# Altium PCB flap.PcbDoc
Units mm, origin at the board's own origin, x right, y up, seen from the top; angles counter-clockwise.
Board outline 90 x 59 mm, 2 copper layers (Top Layer, Bottom Layer); 79 components, 56 nets, 277 pads, 201 vias.
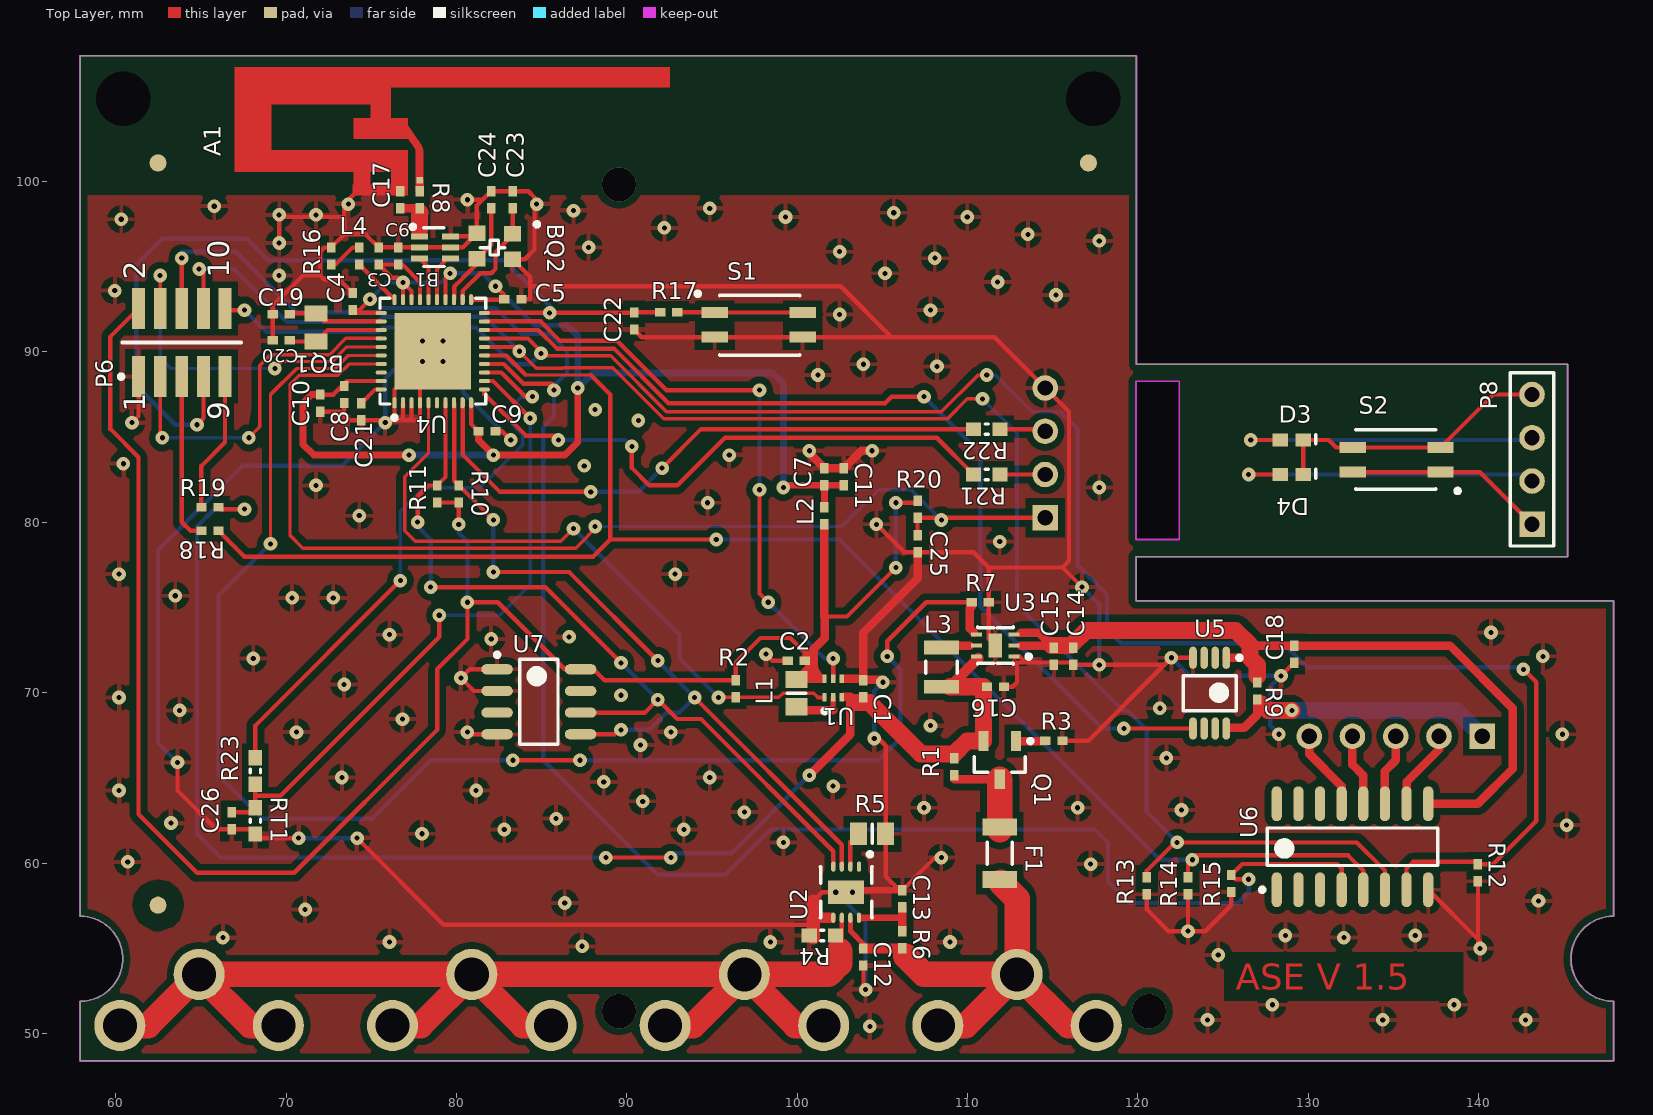
[diagram p0: Top Layer view]
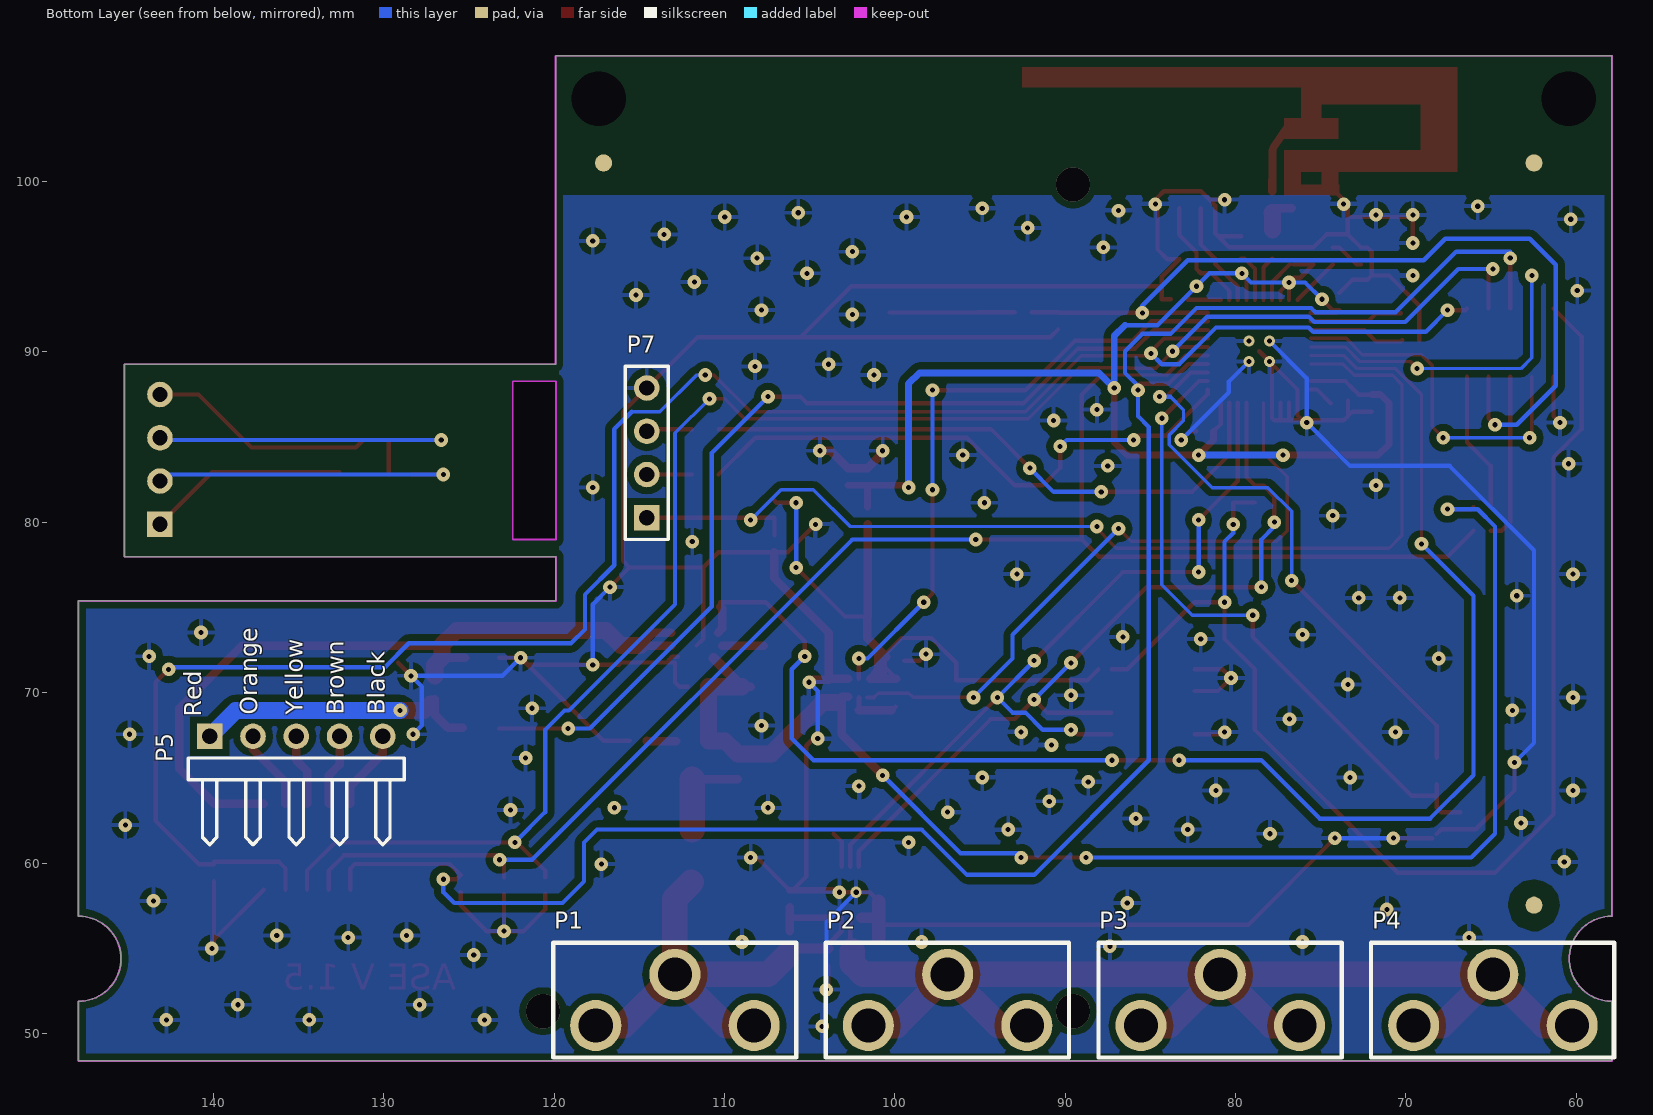
[diagram p1: Bottom Layer view, seen from below]

## Layer stack, top to bottom
Top Layer: signal copper 0.0356
Dielectric: dielectric 0.32, FR-4, Dk 4.8
Bottom Layer: signal copper 0.0356

## Board outline
57.912,48.387 57.912,51.887 ccw(c57.912,54.387) 57.912,56.887 57.912,107.387 119.912,107.387 119.912,89.287 145.212,89.287 145.212,77.978 119.888,77.978 119.888,75.387 147.912,75.387 147.912,56.887 ccw(c147.912,54.387) 147.912,51.887 147.912,48.387
cut-out: 122.428,88.289 119.912,88.289 119.888,88.265 119.888,78.994 122.428,78.994

## Design rules (kind name [scope] priority, off if disabled: settings)
Clearance Clearance_2 [InNet('NetB1_1')] p1: gap=0.16
Clearance Clearance_1 [InPolygon] p2: gap=0.4
Clearance [All] p3: gap=0.2
PolygonConnect [All] p1: connectstyle=Relief reliefconductorwidth=0.254 reliefentries=4 polygonreliefangle="90 Angle"
RoutingVias [All] p1: holewidth=0.711 width=1.27 viastyle="Through Hole" minholewidth=0.711 minwidth=1.27 maxholewidth=0.711 maxwidth=1.27
SilkscreenOverComponentPads [All] p1: minsilkscreentomaskgap=0.254
SolderMaskExpansion [All] p1: expansion=0
Width [All] p1: maxlimit=3 minlimit=0.2 preferedwidth=0.254
27 further rules are at their usual default settings.

## Components (designator, comment, footprint, x,y, rotation, side; value= is the part's Value field where it differs from the comment)
A1 "ANT" "F ant" 77.597,99.822 r0 top
B1 "BALUN" 2450BM15A0002 78.74,96.139 r0 top
BQ1 "Crystal" FC-12M 71.755,91.44 r270 top
BQ2 "Crystal" 403C11A32M00000 82.169,96.139 r180 top
C1 "Capacitor" 0402 103.886,70.231 r90 top
C2 "Capacitor" 0402 99.949,71.882 r180 top
C3 "Capacitor" 0402 75.438,95.631 r90 top
C4 "Capacitor" 0402 73.914,92.964 r90 top
C5 "Capacitor" 0402 83.312,93.091 r0 top
C6 "Capacitor" 0402 76.581,95.631 r90 top
C7 "Capacitor" 0402 101.6,82.677 r90 top
C8 "Capacitor" 0402 73.406,87.503 r270 top
C9 "Capacitor" 0402 81.788,85.344 r0 top
C10 "Capacitor" 0402 72.009,86.995 r270 top
C11 "Capacitor" 0402 102.743,82.677 r90 top
C12 "Capacitor" 0402 103.886,54.483 r270 top
C13 "Capacitor" 0402 106.172,57.912 r90 top
C14 "Capacitor" 0402 116.205,72.136 r270 top
C15 "Capacitor" 0402 115.062,72.136 r270 top
C16 "Capacitor" 0402 111.633,70.358 r0 top
C17 "Capacitor" 0402 76.708,98.933 r90 top
C18 "Capacitor" 0402 129.159,72.263 r270 top
C19 "Capacitor" 0402 69.723,92.202 r0 top
C20 "Capacitor" 0402 69.723,90.678 r0 top
C21 "Capacitor" 0402 74.422,86.487 r270 top
C22 "Capacitor" 0402 90.424,91.821 r270 top
C23 "Capacitor" 0402 83.312,98.933 r270 top
C24 "Capacitor" 0402 82.042,98.933 r270 top
C25 "Capacitor" 0402 107.061,78.74 r270 top
C26 "Capacitor" 0402 66.802,62.484 r270 top
D3 "Led" LED0603 129.032,84.836 r0 top
D4 "Led" LED0603 129.032,82.804 r0 top
F1 "Fuse, slow 0,5A" SF1206S0502 111.887,60.579 r90 top
L1 "Inductor" 6-0805_L 99.949,69.977 r90 top
L2 "Inductor" 0402 101.6,80.391 r90 top
L3 "Inductor" 1008 108.458,71.501 r90 top
L4 "Inductor" 0402 74.295,95.631 r270 top
P1 "Connector" BAT_CLIP1 112.903,53.467 r180 bottom
P2 "Connector" BAT_CLIP1 96.901,53.467 r180 bottom
P3 "Connector" BAT_CLIP1 80.899,53.467 r180 bottom
P4 "Connector" BAT_CLIP1 64.897,53.467 r180 bottom
P5 "24BYJ48" HDR1X5H 140.208,67.437 r180 bottom
P6 "*" 20021121-00010C4LF 63.881,90.551 r90 top
P7 "Header 4" HDR1X4 114.554,80.264 r90 bottom
P8 "Header 4" HDR1X4 143.129,79.883 r90 top
Q1 "IRLML6302GTRPBF" SOT-23_N 111.887,66.04 r270 top
R1 "Blob" 0402 109.22,65.659 r270 top
R2 "Resistor" 0402 96.393,70.231 r270 top
R3 "Resistor" 0402 115.062,67.183 r0 top
R4 "Resistor" 0603 101.473,55.753 r180 top
R5 "Resistor" 6-0805_L 104.394,61.722 r0 top
R6 "Resistor" 0402 106.172,55.499 r90 top
R7 "Resistor" 0402 110.744,75.311 r0 top
R8 "Blob" 0402 77.851,98.933 r90 top
R9 "Resistor" 0402 127,70.104 r90 top
R10 "Resistor" 0402 80.137,81.661 r270 top
R11 "Resistor" 0402 78.867,81.661 r270 top
R12 "Resistor" 0402 139.954,59.436 r270 top
R13 "Resistor" 0402 120.523,58.674 r270 top
R14 "Resistor" 0402 122.936,58.674 r270 top
R15 "Resistor" 0402 125.476,58.801 r270 top
R16 "Resistor" 0402 72.644,95.631 r90 top
R17 "Resistor" 0402 92.456,92.329 r180 top
R18 "Blob" 0402 65.532,79.502 r0 top
R19 "Blob" 0402 65.532,80.899 r0 top
R20 "Resistor" 0402 107.061,80.772 r270 top
R21 "Resister" 0603 111.125,82.804 r180 top
R22 "Resister" 0603 111.125,85.471 r180 top
R23 "Resistor" 0603 68.199,65.405 r90 top
RT1 "Thermistor" 0603 68.199,62.484 r270 top
S1 "Button" EVQP2402W 97.79,91.567 r0 top
S2 "Button" EVQP2402W 135.128,83.693 r180 top
U1 "TPS62730" 6SON 102.108,70.273 r90 top
U2 "STC3100" DFN8 102.87,58.293 r270 top
U3 "TPS61240DRVT" WSON6 111.633,72.771 r180 top
U4 "CC2530F256" QFN40 78.613,90.043 r90 top
U5 "AD8217BRMZ-R7" 8MSOP 124.206,69.977 r270 top
U6 "ULN2003ADR" 16SOIC 132.588,60.96 r90 top
U7 "M24M02" SO8 84.836,69.469 r0 top

## Footprints (in the part's own frame and the unit in brackets; to place one, negate y for a bottom-side part, rotate by r counter-clockwise, add the part's x,y. Pads: shape width x height; smd on the part's side, far side on the other; paste and mask are expansions set on the pad)
6-0805_L [mm] "Chip Resistor, Body 2.0x1.2mm, IPC High Density"
  rect 1x1.3 smd: 1(-0.8,0) 2(0.8,0)
  silkscreen extent 0,-0.55 0,0.55, body extent -1.07,-0.7 1.07,0.7, height 0.7
6SON [mm] "IC DCDC CONV STP-DN SYNC LP 6SON"
  rect 0.5x0.25 smd: 1(-0.55,0.5) 2(-0.55,0) 3(-0.55,-0.5) 4(0.55,-0.5) 5(0.55,0) 6(0.55,0.5)
  silkscreen extent -1.47,0.38 -1.23,0.62, body extent -0.52,-0.75 0.53,0.75, height 0.6
8MSOP [mm] "MSOP, 8-Leads, Body 3,1x3,1mm (max), Pitch 0,65mm, IPC High Density"
  oval 1.3x0.45 smd: 1(-2.075,0.975) 2(-2.075,0.325) 3(-2.075,-0.325) 4(-2.075,-0.975) 5(2.075,-0.975) 6(2.075,-0.325) 7(2.075,0.325) 8(2.075,0.975)
  silkscreen extent -2.2,-1.55 1.02,1.88, body extent -1.55,-1.55 1.55,1.55, height 1.1
16SOIC [mm] "TRANS 7 NPN DARL 50V 500MA 16SO"
  oval 2.05x0.6 smd: 1(-2.525,4.445) 2(-2.525,3.175) 3(-2.525,1.905) 4(-2.525,0.635) 5(-2.525,-0.635) 6(-2.525,-1.905) 7(-2.525,-3.175) 8(-2.525,-4.445) 9(2.525,-4.445) 10(2.525,-3.175) 11(2.525,-1.905) 12(2.525,-0.635) 13(2.525,0.635) 14(2.525,1.905) 15(2.525,3.175) 16(2.525,4.445)
  silkscreen extent -2.65,-5 1.1,5.42, body extent -2,-5 2,5, height 1.75
0402 [mm] "Chip Capacitor, Body 1.0x0.5mm, IPC High Density"
  rect 0.6x0.5 smd: 1(-0.5,0) 2(0.5,0)
  body extent -0.55,-0.3 0.55,0.3, height 1.3
403C11A32M00000 [mm] "CRYSTAL 32MHZ 10PF SMD"
  rect 1x0.9 smd: 1(-1.125,-0.8) 2(0.975,-0.825) 3(0.975,0.675) 4(-1.125,0.7)
  silkscreen extent -2.68,-1.47 0.77,0.45, body extent -1.7,-1.22 1.53,1.15, height 0.85
0603 [mm] "0603, 2-Leads, Body 1,6x0,8mm, IPC High Density"
  rect 0.9x0.8 smd: 1(-0.775,0) 2(0.775,0)
  silkscreen extent -0.1,-0.3 0.1,0.3, body extent -0.8,-0.4 0.8,0.4, height 0.5
1008 [mm]
  rect 0.8x2.05 smd: 1(-1.15,0) 2(1.15,0)
  silkscreen extent -0.35,-0.93 0.35,0.92, body extent -1.25,-1 1.25,1, height 0.6
2450BM15A0002 [mm]
  rect 1x0.35 smd: 1(-0.9,0.65) 2(-0.9,0) 3(-0.9,-0.65) 4(0.925,-0.65) 5(0.925,0) 6(0.925,0.65)
  silkscreen extent -1.42,-1.13 0.55,1.32, body extent -0.63,-1 0.63,1, height 0.7
20021121-00010C4LF [mm] "CONN HEADER 10POS DL UNSHRD SMD"
  rect 2.4x0.75 smd: 1(-2,2.54) 2(2,2.54) 3(-2,1.27) 4(2,1.27) 5(-2,0) 6(2,0) 7(-2,-1.27) 8(2,-1.27) 9(-2,-2.54) 10(2,-2.54)
  silkscreen extent -2.12,-3.5 0.02,3.69, body extent -0.75,-3.5 0.75,3.5, height 5
BAT_CLIP1 [mm] "CONTACT BATTERY AA NEGATIVE"
  round 3 hole 2: 1(-4.65,-3) 1(0,0) 1(4.65,-3)
  silkscreen extent -7.15,-4.87 7.12,1.85, body extent -6.48,-4.38 6.25,1.35, height 14
DFN8 [mm]
  oval 0.6x0.25 smd: 1(-1.5,0.75) 2(-1.5,0.25) 3(-1.5,-0.25) 4(-1.5,-0.75) 5(1.5,-0.75) 6(1.5,-0.25) 7(1.5,0.25) 8(1.5,0.75)
  rect 1.4x2.1 smd: 9(0,0)
  silkscreen extent -2.35,-1.53 1.5,1.53, body extent -1.5,-1.5 1.5,1.5, height 0.9
EVQP2402W [mm] "QFN, 4-Leads, Body 3,5x4,7mm (max), Pitch 1,70mm, IPC High Density"
  rect 1.55x0.65 smd: 1(-2.625,0.75) 2(-2.625,-0.7) 3(2.525,0.75) 4(2.525,-0.7)
  silkscreen extent -3.75,-1.75 2.35,1.97, body extent -2.35,-1.75 2.35,1.75, height 2.5
"F ant" [mm] "F antenna 2.4Ghz"
  rect 0.4x0.4 smd paste+0: 1(0.254,0.254)
  rect 3x0.01 smd: 2(-2.032,0)
  Top Layer region: -3.65,0 -2.65,0 -2.65,0.74 -3.65,0.74
  Top Layer region: -1.45,0 -0.45,0 -0.45,0.74 -1.45,0.74
  Top Layer region: -2.65,3.9 -1.45,3.9 -1.45,4.7 -2.65,4.7
  Top Layer region: -8.45,0.74 -3.575,0.74 -3.575,2.03 -8.45,2.03
  Top Layer region: -10.63,4.7 -1.45,4.7 -1.45,5.7 -10.63,5.7
  Top Layer region: -10.63,5.7 14.95,5.7 14.95,6.91 -10.63,6.91
  Top Layer region: -10.63,0.74 -8.45,0.74 -8.45,4.7 -10.63,4.7
  Top Layer region: -3.65,2.69 -0.45,2.69 -0.45,3.9 -3.65,3.9
  Top Layer region: -3.65,0.74 -0.45,0.74 -0.45,2.03 -3.65,2.03
  Top Layer region: 0,0 0.46,0 0.46,2.03 0,2.03
  Top Layer region: 0,2.03 0.379,2.291 -0.577,3.681 -0.956,3.421
  Top Layer region: 0,2.03 0.46,2.03 0.379,2.291
FC-12M [mm]
  rect 0.95x1.35 smd: 1(-0.825,0) 2(0.825,0)
  body extent -1.02,-0.6 1.02,0.6, height 0.6
HDR1X4 [mm] "Connector; Header; 4 Position"
  rect 1.5x1.5 hole 0.9: 1(0,0)
  round 1.5 hole 0.9: 2(2.54,0) 3(5.08,0) 4(7.62,0)
  silkscreen extent -1.27,-1.27 8.89,1.27
HDR1X5H [mm] "Connector; Header; 5 Position; Right Angle"
  rect 1.5x1.5 hole 0.9: 1(0,0)
  round 1.5 hole 0.9: 2(2.54,0) 3(5.08,0) 4(7.62,0) 5(10.16,0)
  silkscreen extent -1.27,-6.35 11.43,-1.27
LED0603 [mm] "Molded Diode, 2-Leads, Body 1,7x0,9mm, IPC High Density"
  rect 0.9x0.75 smd: 1(-0.675,0) 2(0.675,0)
  silkscreen extent 1.4,-0.23 1.4,0.32, body extent -0.9,-0.5 0.9,0.5, height 0.85
QFN40 [mm]
  oval 0.65x0.25 smd: 1(-3.025,2.25) 2(-3.025,1.75) 3(-3.025,1.25) 4(-3.025,0.75) 5(-3.025,0.25) 6(-3.025,-0.25) 7(-3.025,-0.75) 8(-3.025,-1.25) 9(-3.025,-1.75) 10(-3.025,-2.25) 21(3.025,-2.25) 22(3.025,-1.75) 23(3.025,-1.25) 24(3.025,-0.75) 25(3.025,-0.25) 26(3.025,0.25) 27(3.025,0.75) 28(3.025,1.25) 29(3.025,1.75) 30(3.025,2.25)
  oval 0.25x0.65 smd: 11(-2.25,-3.025) 12(-1.75,-3.025) 13(-1.25,-3.025) 14(-0.75,-3.025) 15(-0.25,-3.025) 16(0.25,-3.025) 17(0.75,-3.025) 18(1.25,-3.025) 19(1.75,-3.025) 20(2.25,-3.025) 31(2.25,3.025) 32(1.75,3.025) 33(1.25,3.025) 34(0.75,3.025) 35(0.25,3.025) 36(-0.25,3.025) 37(-0.75,3.025) 38(-1.25,3.025) 39(-1.75,3.025) 40(-2.25,3.025)
  rect 4.5x4.5 smd: 41(0,0)
  silkscreen extent -4.02,-3.1 3.1,3.1, body extent -3.08,-3.08 3.08,3.08, height 1
SF1206S0502 [mm] "FUSE BOARD MNT 500MA 63VDC 1206"
  rect 1x2 smd: 1(-1.55,0) 2(1.55,0)
  silkscreen extent -0.65,-0.72 0.65,0.72, body extent -1.55,-0.77 1.55,0.77, height 0.6
SO8 [mm] "SOIC, 8-Leads, Body 5,0x4,0mm (max), Pitch 1,27mm, IPC High Density"
  oval 1.85x0.6 smd: 1(-2.45,1.905) 2(-2.45,0.635) 3(-2.45,-0.635) 4(-2.45,-1.905) 5(2.45,-1.905) 6(2.45,-0.635) 7(2.45,0.635) 8(2.45,1.905)
  silkscreen extent -2.57,-2.5 1.12,2.88, body extent -2,-2.5 2,2.5, height 1.75
SOT-23_N [mm] "SOT23, 3-Leads, Body 2.9x1.3mm, Pitch 0.95mm, Lead Span 2.5mm, IPC Medium Density"
  rect 1.15x0.6 smd: 1(-1.125,0.95) 2(-1.125,-0.95) 3(1.125,0)
  silkscreen extent -1.25,-1.5 0.7,1.93, body extent -0.7,-1.5 0.7,1.5, height 1.1
WSON6 [mm] "QFN, 6-Leads, Body 2,1x2,1mm (max), Pitch 0,65mm, IPC Medium Density"
  rect 0.65x0.25 smd: 1(-1.1,0.65) 2(-1.1,0) 3(-1.1,-0.65) 4(1.1,-0.65) 5(1.1,0) 6(1.1,0.65)
  rect 0.8x1.4 smd: 7(0,0)
  silkscreen extent -2.08,-1.1 1.05,1.1, body extent -1.05,-1.05 1.05,1.05, height 0.8

## Part data
A1: "Inverted-F Antenna"
B1: "BALUN JTI MATCHED ZIGBEE"
BQ1: library part 6LC:308C, "CRYSTAL 32.768KHZ 12.5PF SMD"
BQ2: library part HC-49SMD, "CRYSTAL 32MHZ 10PF SMD"
C1 C2 C3 C14 C15 C16 C18: library part Cap, "CAP CER 2.2UF 6.3V 20% X5R 0402"
C4 C12 C21: library part Cap, "CAP CER 1UF 6.3V 10% X5R 0402"
C5 C6 C7 C8 C9 C10 C11 C22 C25 C26: library part Cap, "CAP CER 0.1UF 10V 20% X5R 0402"
C13: library part Cap, "CAP CER 0.22UF 10V 10% X5R 0402"
C17: library part Cap, "CAP CER 0.5PF 50V NP0 0402"
C19 C20: library part Cap, "CAP CER 22PF 50V 5% NP0 0402"
C23 C24: library part Cap, "CAP CER 15PF 50V 5% NP0 0402"
D3: library part LED0, "LED SUPER RED CLEAR 0603 SMD"
D4: library part LED0, "LED GREEN CLEAR THIN 0603 SMD"
F1: library part "Fuse 2", "FUSE 0,5A 63V 1206 SLOW"
L1: "INDUCTOR 2.2UH 0805"
L2: "FILTER CHIP 1000 OHM 250MA 0402"
L3: "INDUCTOR POWER 1UH 2.2A 1008"
L4: "INDUCTOR 6.8NH 300MA 0402"
P1 P2 P3 P4: library part "Header 2", "CONTACT BATTERY AA NEGATIVE"
P5: library part "Header 5H", "Header, 5-Pin, Right Angle"
P6: library part "Header 5X2", "CONN HEADER 10POS DL UNSHRD SMD"
P7 P8: "Header, 4-Pin"
Q1: library part IRLML6302, "HEXFET Power MOSFET"
R1 R8 R18 R19: library part Res3, "RES 0.0 OHM 1/10W JUMP 0402 SMD"
R2 R3 R7 R12 R13 R14 R15: library part Res3, "RES 10K OHM 1/10W 5% 0402 SMD"
R4: library part Res3, "RES 0.02 OHM 1/4W 1% 0603"
R5: library part Res3, "RES 200K OHM 1/8W .1% 0805 SMD"
R6: library part Res3, "RES 1K OHM 1/10W 1% 0402 SMD"
R9: library part Res3, "RES 0.5 OHM 1/16W 1% 0402 SMD"
R10 R11 R17: library part Res3, "RES 2.7K OHM 1/10W 5% 0402 SMD"
R16 R20: library part Res3, "RES 56K OHM 1/10W 1% 0402 SMD"
R21 R22: library part Res3, "RES 200 OHM 1/10W 5% 0603 SMD"
R23: library part Res3, "RES 2.0K OHM 1/10W 5% 0603 SMD"
RT1: library part "Res Thermal", "THERMISTOR NTC 1K OHM 5% 0603"
S1 S2: library part SW-PB, "SWITCH TACTILE SPST-NO 0.02A 15V"
U1: "IC DCDC CONV STP-DN SYNC LP 6SON"
U2: "IC BATTERY MON W/GAUGE 8-DFN"
U3: "IC REG BOOST SYNC 5V 0.45A 6SON"
U4: "IC SOC IEEE 802.15.4/ZIG 40VQFN"
U5: "IC CURRENT MONITOR HI SIDE 8MSOP"
U6: library part ULN2004ADR, "TRANS 7 NPN DARL 50V 500MA 16SO"
U7: "IC EEPROM 2MBIT 1MHZ 8SO"

## Free pads (board coordinates)
  round 1.524 hole 3.2: 1(60.452,104.847) 1(117.372,104.847)
  round 1 smd mask+1: 1(62.484,57.531) 1(62.484,101.092) 1(117.094,101.092)
  round 1 smd far side mask+1: 1(62.484,57.531) 1(62.484,101.092) 1(117.094,101.092)

## Via types
v1: diameter 0.8, hole 0.3, Top Layer to Bottom Layer, tented both sides, 193 vias
v2: diameter 0.66, hole 0.3, Top Layer to Bottom Layer, tented top, 4 vias
v3: diameter 2, hole 2, Top Layer to Bottom Layer, 3 vias
v4: diameter 0.66, hole 0.33, Top Layer to Bottom Layer, tented top, 1 vias

## Nets (pads, with @x,y where several pads share a name; then routed paths per layer and width w, separated by ;. In a path a pad name is that pad's centre, name@x,y a point inside that pad or via, vN(x,y) a via of type N, cw(c..) or ccw(c..) an arc to the next point about the centre after c; other vN are vias at no path point)
5V_ON: R7.1 U3.4 U4.36 | length 87.7
  Top Layer w0.2: v1(69.088,78.74) 69.088,87.503 70.612,89.027 72.873,89.027 73.639,89.793 U4.36
  Top Layer w0.254: v1(83.312,66.04) v1(87.249,66.04) ; v1(105.283,72.136) 105.283,73.025 107.569,75.311 R7.1
  Top Layer w0.5: 110.236,75.057 110.133,74.954 110.133,73.763 U3.4@110.363,73.533
  Bottom Layer w0.254: v1(69.088,78.74) 66.04,75.692 66.04,65.151 68.58,62.611 75.057,62.611 78.486,66.04 v1(83.312,66.04) ; v1(87.249,66.04) 104.775,66.04 106.045,67.31 106.045,71.374 v1(105.283,72.136)
5VCC: C14.1 C15.1 C18.1 R9.2 U3.2 U3.3 U5.1 U6.9 | length 46.3
  Top Layer w0.254: 126.576,72.814 126.627,72.763
  Top Layer w0.5: 113.133,72.771 C15.1@114.927,72.771 ; 113.133,73.533 114.165,73.533 C15.1@114.927,72.771 ; C15.1 C15.1@114.927,72.771 ; C14.1@116.07,72.771 C14.1 ; U5.1@125.206,72.052 126.576,72.052 ; 126.627,72.763 C18.1 138.311,72.763 141.986,69.088 141.986,65.532 139.939,63.485 U6.9
  Top Layer w1: C15.1@114.927,72.771 116.07,72.771 116.959,73.66 125.73,73.66 126.576,72.814 126.576,72.052 127,71.628 127,70.993
A: P5.2 U6.10 | length 4.7
  Top Layer w0.5: U6.10 135.763,64.77 137.668,66.675 P5.2
B: P5.3 U6.11 | length 4.2
  Top Layer w0.5: U6.11 134.493,65.405 135.128,66.04 P5.3
BAT_VCC: C1.1 C16.1 L3.1 Q1.2 R1.1 R19.2 U1.3 U3.6 | length 84.6
  Top Layer w0.254: R19.2 66.159,80.772 v1(67.564,80.772) ; v1(88.773,60.325) v1(92.583,60.325)
  Top Layer w0.5: v1@100.838,65.278 103.124,67.564 103.124,69.773 ; 102.735,69.773 103.124,69.773 ; 103.466,69.43 103.124,69.773 ; L3.1 L3.1@108.959,70.351 ; C16.1@111.126,70.351 C16.1
  Top Layer w0.6: L3.1@108.959,70.351 U3.6@110.631,72.023
  Top Layer w1: 103.466,69.43 104.228,69.43 107.246,66.413 109.22,66.413 109.972,67.165 Q1.2 110.937,70.351 L3.1@108.959,70.351
  Bottom Layer w0.254: v1(67.564,80.772) 65.786,80.772 64.77,79.756 64.77,61.722 66.167,60.325 v1(88.773,60.325) ; v1@92.583,60.579 96.139,60.579 v1(100.711,65.151)
C: P5.4 U6.12 | length 4.2
  Top Layer w0.5: P5.4 132.588,65.786 133.223,65.151 U6.12
CC2530_CLK: P6.6 R15.1 U4.14 U6.4 | length 116.7
  Top Layer w0.254: P6.6 v1(63.881,95.504) ; U4.14 82.773,89.293 83.928,88.138 85.598,88.138 85.725,88.011 v1(85.725,87.757) ; v1(126.492,59.055) 125.722,59.055 R15.1 126.119,59.944 131.699,59.944 131.953,59.69 U6.4
  Bottom Layer w0.254: v1(63.881,95.504) 63.881,95.885 67.056,95.885 70.612,92.329 75.311,92.329 75.565,92.583 82.296,92.583 83.82,91.059 85.471,91.059 86.487,90.043 86.487,88.773 85.725,88.011 v1(85.725,87.757) 85.725,86.233 85.09,85.598 85.09,66.04 91.821,59.309 95.758,59.309 98.425,61.976 117.475,61.976 118.237,61.214 118.237,58.928 119.507,57.658 125.857,57.658 126.492,58.293 v1(126.492,59.055)
CC2530_DC: P6.3 U4.34 | length 21
  Top Layer w0.2: P6.3 62.611,85.09 v1(62.738,84.963) ; v1(67.818,84.963) 68.453,85.598 68.453,89.205 69.088,89.84 72.554,89.84 73.507,90.793 U4.34
  Bottom Layer w0.2: v1(62.738,84.963) v1(67.818,84.963)
CC2530_DD: P6.4 U4.35 | length 20.5
  Top Layer w0.2: P6.4 v1(62.611,94.488) ; v1(69.342,89.027) 69.755,89.44 72.72,89.44 73.573,90.293 U4.35
  Bottom Layer w0.2: v1(62.611,94.488) 62.611,89.662 63.246,89.027 v1(69.342,89.027)
CC2530_MISO: P6.10 R12.1 U4.17 U6.7 | length 116.4
  Top Layer w0.2: v1(84.963,89.916) 85.111,89.768 89.048,89.768 92.329,86.487 108.458,86.487 110.617,88.646 v1(111.125,88.646)
  Top Layer w0.254: P6.10 66.516,92.456 v1(67.564,92.456) ; U4.17 84.201,90.793 84.963,90.031 v1(84.963,89.916) ; U6.7 135.763,59.69 136.144,60.071 R12.1@139.954,60.071 ; R12.1 140.835,59.936 143.383,62.484 143.383,70.612 v1(142.621,71.374)
  Bottom Layer w0.2: v1(111.125,88.646) 111.633,88.646 113.792,86.487 115.443,86.487
  Bottom Layer w0.254: v1(67.564,92.456) 68.841,91.179 75.445,91.179 75.706,91.44 81.153,91.44 83.312,89.281 84.328,89.281 v1(84.963,89.916) ; 115.443,86.487 116.459,85.471 116.459,77.482 118.183,75.758 118.183,73.714 118.999,72.898 128.524,72.898 129.921,71.501 142.494,71.501 v1(142.621,71.374)
CC2530_MOSI: P6.8 R13.1 U4.16 U6.6 | length 102.7
  Top Layer w0.2: v1(83.693,90.043) 84.69,89.046 86.252,89.046 86.279,89.073 89.177,89.073 92.163,86.087 108.82,86.087 109.982,87.249 v1(110.871,87.249)
  Top Layer w0.254: v1(64.897,94.869) 65.151,94.615 P6.8 ; U4.16 83.443,90.293 v1(83.693,90.043) ; R13.1 120.523,59.563 122.174,61.214 v1(122.301,61.214) 132.842,61.214 134.493,59.563 U6.6
  Bottom Layer w0.2: v1(110.871,87.249) 112.903,85.217
  Bottom Layer w0.254: v1(64.897,94.869) 66.929,94.869 70.044,91.754 75.378,91.754 75.699,92.075 81.661,92.075 v1(83.693,90.043) ; 112.903,85.217 112.903,75.184 119.126,68.961 119.38,68.961 120.523,67.818 120.523,62.992 v1(122.301,61.214)
CC2530_RESET: C22.1 P6.7 R17.2 U4.20 | length 51.9
  Top Layer w0.254: v1(64.77,85.725) 65.151,86.106 P6.7 ; U4.20 v1(85.471,92.293) 90.396,92.293 C22.1 91.948,92.321 R17.2
  Bottom Layer w0.254: v1(64.77,85.725) 63.5,85.725 61.214,88.011 61.214,95.123 62.738,96.647 67.691,96.647 68.961,95.377 82.804,95.377 85.471,92.71 v1(85.471,92.293)
CC2530_SS: R14.1 R18.2 U4.15 U6.5 | length 95.6
  Top Layer w0.2: 84.062,88.646 87.884,88.646
  Top Layer w0.254: R18.2 67.556,77.978 88.011,77.978 89.027,78.994 ; U4.15 82.927,89.793 82.966,89.754 82.966,89.742 84.062,88.646 ; 87.884,88.646 89.027,87.503 89.027,78.994 ; v1(95.25,78.994) 89.027,78.994 ; R14.1 122.936,59.944 v1(123.19,60.198) 123.444,60.452 132.334,60.452 133.223,59.563 U6.5
  Bottom Layer w0.254: v1(95.25,78.994) 102.489,78.994 121.285,60.198 v1(123.19,60.198)
CC_VCC: C3.1 C4.1 C5.1 C6.1 C7.1 C8.1 C9.1 C10.1 C11.1 L2.2 U4.10 U4.21 U4.24 U4.27 U4.28 U4.29 U4.31 U4.39 | length 87.5
  Top Layer w0.254: C10.1 72.771,87.495 72.829,87.553 72.829,87.565 73.021,87.757 73.033,87.757 73.569,88.293 U4.39 ; v1(74.93,93.091) 74.303,92.464 C4.1 74.085,92.293 U4.31 ; C6.1 C3.1 76.208,94.361 76.581,94.361 v1(76.863,94.079) ; C6.1@76.827,95.131 77.863,94.095 U4.27 ; U4.29 v1(76.863,94.079) ; U4.28 77.363,93.579 v1(76.863,94.079) ; U4.24 79.363,94.349 v1(79.629,94.615) ; U4.10 80.863,85.769 C9.1 ; U4.21 82.789,93.068 C5.1 82.812,93.337 v1(82.296,93.853)
  Top Layer w0.4: C10.1 71.493,87.495 70.993,86.995 70.993,84.582 71.628,83.947 v1(77.216,83.947) ; C9.1 81.288,84.828 v1(82.169,83.947) 86.36,83.947 87.122,84.709 v1(87.122,87.884) ; v1(99.187,82.042) 99.322,82.177 C7.1 ; L2.2 C7.1 ; C11.1 C7.1
  Bottom Layer w0.254: v1(74.93,93.091) 75.918,94.079 v1(76.863,94.079) 79.093,94.079 v1(79.629,94.615) 81.534,94.615 v1(82.296,93.853) 84.583,91.566 85.772,91.566 85.773,91.567 86.487,91.567
  Bottom Layer w0.4: v1(77.216,83.947) v1(82.169,83.947) ; 86.487,91.567 87.122,90.932 v1(87.122,87.884) 88.011,88.773 98.552,88.773 99.187,88.138 v1(99.187,82.042)
D: P5.5 U6.13 | length 5.4
  Top Layer w0.254: P5.5 P5.5@130.495,67.884
  Top Layer w0.5: P5.5 130.048,66.421 131.953,64.516 U6.13
GND: A1.2 B1.2 B1.5 B1.6 BQ2.2 BQ2.4 C1.2 C2.2 C3.2 C4.2 C5.2 C6.2 C7.2 C8.2 C9.2 C10.2 C11.2 C12.2 C13.2 C14.2 C15.2 C16.2 C17.2 C18.2 C19.1 C20.1 C21.2 C22.2 C23.1 C24.1 C25.2 C26.2 P6.1 P7.4 R3.2 R4.2 R5.2 R7.2 R12.2 R13.2 R14.2 R15.2 R16.2 RT1.2 S1.2 S1.4 U1.4 U2.5 U2.9 U3.1 U3.7 U4.1 U4.2 U4.3 U4.4 U4.41 U5.4 U6.8 U7.1 U7.2 U7.4 | length 340.6
  Top Layer w0.254: v1(60.96,85.852) 61.341,86.233 P6.1 ; v1(63.627,65.913) 63.627,64.262 65.905,61.984 C26.2 67.924,61.984 RT1.2 ; RT1.2@68.44,61.468 v1(70.739,61.468) ; C20.1 C19.1 69.223,92.718 70.993,94.488 72.009,94.488 ; v1(69.596,96.393) 69.596,97.917 73.414,97.917 ; C10.2 73.144,86.495 73.406,86.233 ; C8.2@73.406,87.13 73.406,86.233 ; C4.2 73.144,94.234 72.263,94.234 72.009,94.488 ; 74.041,99.314 73.414,98.687 73.414,97.917 ; v1(74.168,61.468) 79.248,56.388 100.952,56.388 ; 75.954,99.433 C17.2 ; U4.2 76.863,86.134 76.716,85.987 ; U4.3 77.363,86.126 77.224,85.987 ; B1.6 BQ2.2@81.019,96.789 ; v1(80.645,98.933) 81.53,98.933 ; v1@80.772,67.564 U7.4 ; C9.2 82.677,85.344 v1(83.185,84.836) ; U7.2 81.026,70.104 v1(80.264,70.866) 80.772,71.374 U7.1 ; C5.2 84.328,93.091 84.328,93.853 ; C22.2 90.878,90.867 S1.2 S1.4 105.537,90.867 ; v1@98.044,72.39 98.552,71.882 C2.2 ; 100.571,56.388 100.976,56.793 ; 100.952,57.772 101.473,58.293 v4(102.27,58.293) U2.9 ; 101.092,56.769 101.116,56.793 ; v1(103.251,58.293) U2.9@103.37,58.412 ; C1.2@103.836,70.823 C1.2@103.886,70.773 ; C12.2 103.886,52.705 v1(104.013,52.578) ; v1@104.521,67.564 105.194,66.891 R5.2 105.194,59.22 106.002,58.412 C13.2 108.085,60.325 v1(108.458,60.325) ; v1(104.648,79.883) 106.291,78.24 C25.2 110.355,78.24 111.244,77.351 ; U3.7 111.244,73.16 R7.2 111.244,77.351 ; C16.2 112.649,70.358 112.903,70.612 112.903,71.771 116.07,71.771 C14.2 v1(117.729,71.636) 121.547,71.636 ; U3.1 113.061,72.121 113.284,71.898 ; R3.2 117.094,67.183 121.547,71.636 ; v1(116.713,76.2) 115.562,77.351 ; R13.2 120.523,57.277 121.793,56.007 v1(122.936,56.007) 123.952,56.007 125.476,57.531 R15.2 ; v1@122.936,56.261 R14.2 ; U5.4 v1(121.963,72.052) 121.547,71.636 ; v1@128.143,67.437 v1(128.27,67.564) ; v1(128.397,70.993) 129.159,71.755 C18.2 ; U6.8 139.954,55.514 ; v1@139.954,55.118 139.954,55.514 ; R12.2 139.954,55.514 ; v1(140.081,54.991) 140.081,55.387 139.954,55.514 ; 72.009,94.488 72.009,95.885 72.255,96.131 R16.2 73.414,96.901 ; 73.406,86.233 73.652,85.987 C21.2 v1@76.081,85.987 ; 73.414,96.901 73.414,97.917 ; 73.414,96.901 74.668,96.901 C3.2 75.446,96.139 B1.2 B1.5 80.369,96.139 BQ2.2@81.019,96.789 ; v1@76.081,85.987 76.716,85.987 ; v1@76.081,85.987 76.363,86.269 U4.1 76.363,87.793 U4.41@77.863,89.293 ; 76.716,85.987 77.224,85.987 ; 77.224,85.987 77.732,85.987 77.863,86.118 U4.4 U4.41@77.863,89.293 ; U4.41@77.863,89.293 U4.41 v2(78.013,89.443) U4.41@77.863,89.293 ; BQ2.2@81.019,96.789 BQ2.2 81.194,98.597 81.53,98.933 ; 81.53,98.933 82.03,99.433 C24.1 C23.1 84.209,99.433 84.582,99.06 84.582,96.012 84.009,95.439 BQ2.4 84.328,94.405 84.328,93.853 ; 84.328,93.853 102.551,93.853 105.537,90.867 ; 105.537,90.867 111.571,90.867 P7.4 115.951,86.487 115.951,77.74 115.562,77.351 ; 111.244,77.351 115.562,77.351
  Top Layer w0.4: U2.9@103.37,58.412 C13.2
  Top Layer w0.5: v1(100.711,84.201) 100.711,84.066 C7.2 C11.2 103.767,84.201 v1(104.394,84.201) ; 102.739,70.823 C1.2@103.836,70.823 ; v1(105.029,70.612) 104.868,70.773 103.886,70.773 103.886,73.533 107.061,76.708 C25.2
  Top Layer w0.6: 100.976,56.793 101.987,56.793
  Top Layer w0.8: R4.2@100.952,55.626 100.952,57.772
  Bottom Layer w0.254: v1(63.627,65.913) 62.484,67.056 62.484,78.359 67.437,83.312 73.279,83.312 v1(75.819,85.852) 75.819,88.449 v2(78.013,90.643) ; v1(70.739,61.468) v1(74.168,61.468) ; v2(79.213,89.443) 80.391,88.265 80.391,87.63 v1(83.185,84.836) ; v4(102.27,58.293) 104.013,56.55 v1(104.013,52.578) ; v1(104.521,67.31) 104.521,70.104 v1(105.029,70.612) ; v1(116.713,76.2) 117.729,75.184 v1(117.729,71.636) ; v1(121.963,72.052) 123.022,70.993 v1(128.397,70.993) 127.762,70.358 127.762,68.072 v1(128.27,67.564)
  other v1: 104.267,50.419 124.079,50.8 134.366,50.8 142.748,50.8 127.889,51.689 138.557,51.689 124.714,54.61 87.376,55.118 76.073,55.372 98.425,55.372 108.966,55.372 66.294,55.626 132.08,55.626 128.651,55.753 136.271,55.753 71.12,57.277 86.36,57.658 143.51,57.785 117.221,59.944 60.706,60.071 99.187,61.214 77.978,61.722 82.804,61.976 93.345,61.976 145.161,62.23 63.246,62.357 85.852,62.611 96.901,62.992 122.555,63.119 107.442,63.246 116.459,63.246 90.932,63.627 60.198,64.262 81.153,64.262 102.108,64.516 88.646,64.77 73.279,65.024 94.869,65.024 121.666,66.167 90.805,66.929 144.907,67.564 70.612,67.691 80.645,67.691 92.583,67.691 107.823,68.072 76.835,68.453 63.754,68.961 121.285,69.088 60.198,69.723 89.662,69.85 73.406,70.485 68.072,72.009 143.764,72.136 98.171,72.263 82.042,73.152 86.614,73.279 76.073,73.406 140.716,73.533 70.358,75.565 72.771,75.565 63.5,75.692 60.198,76.962 92.837,76.962 111.887,78.867 74.295,80.391 94.742,81.153 117.729,82.042 71.755,82.169 87.503,83.312 60.452,83.439 96.012,83.947 90.678,85.979 88.138,86.614 101.219,88.646 108.204,89.154 103.886,89.281 102.489,92.202 107.823,92.456 115.189,93.345 59.944,93.599 111.76,94.107 69.596,94.488 105.156,94.615 108.077,95.504 102.489,95.885 87.757,96.139 117.729,96.52 113.538,96.901 92.202,97.282 60.325,97.79 99.314,97.917 109.982,97.917 69.596,98.044 71.755,98.044 105.664,98.171 86.868,98.298 94.869,98.425 65.786,98.552 73.66,98.679 84.709,98.679
  other v2: 79.213,90.643
LED1_1: D4.1 P8.2 | length 18.7
  Top Layer w0.254: v1(126.492,82.804) D4.1
  Bottom Layer w0.254: v1(126.492,82.804) 142.748,82.804 P8.2
LED1_2: R21.2 U4.11 | length 34
  Top Layer w0.254: U4.11 81.638,87.526 84.074,85.09 85.725,85.09 v1(85.979,84.836) ; v1(90.297,84.455) 90.297,83.185 91.313,82.169 92.964,82.169 95.758,84.963 108.191,84.963 R21.2
  Bottom Layer w0.254: v1(85.979,84.836) 89.916,84.836 v1(90.297,84.455)
LED2_1: D3.1 P8.3 | length 18.3
  Top Layer w0.254: v1(126.619,84.836) D3.1
  Bottom Layer w0.254: v1(126.619,84.836) 143.002,84.836 P8.3
LED2_2: R22.2 U4.9 | length 35.5
  Top Layer w0.254: U4.9 80.363,83.975 82.55,81.788 v1(87.884,81.788) ; v1(92.075,83.185) 94.361,85.471 R22.2
  Bottom Layer w0.254: v1(87.884,81.788) 90.678,81.788 v1(92.075,83.185)
NetA1_1: A1.1 R8.2 | length 0.6
  Top Layer w0.5: R8.2 A1.1
NetB1_1: B1.1 C17.1 R8.1 | length 2.4
  Top Layer w0.254: R8.1@77.851,98.171 R8.1
  Top Layer w0.5: C17.1 R8.1
  Top Layer w1: 77.84,97.155 77.84,98.16 R8.1@77.851,98.171
NetB1_3: B1.3 U4.26 | length 2.6
  Top Layer w0.254: B1.3 78.363,94.966 U4.26
NetB1_4: B1.4 U4.25 | length 2.9
  Top Layer w0.254: U4.25 78.863,94.877 79.475,95.489 B1.4
NetBQ1_1: BQ1.1 C19.2 U4.32 | length 5.5
  Top Layer w0.254: C19.2@70.286,92.265 BQ1.1 72.227,91.793 U4.32
NetBQ1_2: BQ1.2 C20.2 U4.33 | length 5.7
  Top Layer w0.254: C20.2 70.286,90.615 BQ1.2 72.433,91.293 U4.33
NetBQ2_1: BQ2.1 C23.2 U4.22 | length 7
  Top Layer w0.254: U4.22 80.363,93.571 81.407,94.615 82.042,94.615 82.296,94.869 82.296,95.853 83.294,96.851 BQ2.1 83.312,96.957 C23.2
NetBQ2_3: BQ2.3 C24.2 U4.23 | length 6.3
  Top Layer w0.254: U4.23 79.863,93.821 80.356,94.314 80.356,94.326 81.194,95.164 BQ2.3 82.042,96.312 C24.2
NetC12_1: C12.1 F1.1 P1.1 R6.1 U2.7 | length 28.7
  Top Layer w0.254: C12.1 C12.1@103.886,55.245
  Top Layer w0.3: U2.7 103.12,56.011 C12.1@103.886,55.245
  Top Layer w0.5: 105.91,54.983 105.918,54.991
  Top Layer w0.6: C12.1 105.91,54.983
  Top Layer w1.5: 106.362,54.546 107.442,53.467 P1.1@112.903,53.467 ; P1.1@108.253,50.467 109.903,50.467 P1.1@112.903,53.467 ; F1.1@111.95,58.864 112.903,57.912 P1.1@112.903,53.467 ; P1.1@117.553,50.467 115.903,50.467 P1.1@112.903,53.467
NetC13_1: C13.1 R6.2 U2.8 | length 3.8
  Top Layer w0.254: 106.148,56.793 106.172,56.769
  Top Layer w0.4: 103.759,56.793 106.148,56.793
  Top Layer w0.5: R6.2 106.172,56.769 C13.1
NetC21_1: C21.1 U4.40 | length 1.5
  Top Layer w0.254: C21.1 75.228,87.793 U4.40
NetD3_2: D3.2 D4.2 P8.4 S2.2 S2.4 | length 16.9
  Top Layer w0.254: D4.2 D3.2 131.191,84.836 131.634,84.393 S2.4 S2.2 140.863,87.503 P8.4
NetF1_2: F1.2 Q1.3 R1.2 | length 5.6
  Top Layer w0.5: R1.2@109.22,64.915 Q1.3
  Top Layer w1.5: F1.2@111.887,61.954 Q1.3
NetL1_1: L1.1 U1.2 | length 3
  Top Layer w0.254: L1.1 L1.1@100.165,68.961
  Top Layer w0.3: 102.108,68.961 U1.2
  Top Layer w0.5: L1.1@100.165,68.961 102.108,68.961
NetL3_2: L3.2 U3.5 | length 2.4
  Top Layer w0.5: L3.2@107.689,72.771 110.133,72.771
NetL4_1: L4.1 R16.1 | length 2.1
  Top Layer w0.254: R16.1 72.906,95.131 73.906,96.131 L4.1
NetL4_2: L4.2 U4.30 | length 2.9
  Top Layer w0.254: L4.2 76.358,93.068 U4.30
NetP2_1: P2.1 P3.1 P4.1 R4.1 U2.6 | length 75.9
  Top Layer w0.254: 102.502,54.864 102.62,54.982 U2.6
  Top Layer w1.5: P4.1@60.247,50.467 61.897,50.467 P4.1@64.897,53.467 ; P4.1@69.547,50.467 67.897,50.467 P4.1@64.897,53.467 ; P3.1@76.249,50.467 77.899,50.467 P3.1@80.899,53.467 ; P3.1@85.549,50.467 83.899,50.467 P3.1@80.899,53.467 ; P2.1@92.251,50.467 93.901,50.467 P2.1@96.901,53.467 ; P2.1@101.551,50.467 99.901,50.467 P2.1@96.901,53.467 ; 102.492,54.854 102.489,54.851 102.489,54.102 101.854,53.467 P2.1@96.901,53.467 ; P4.1@64.897,53.467 P3.1@80.899,53.467 ; P3.1@80.899,53.467 P2.1@96.901,53.467
NetP5_1: P5.1 R9.1 U5.8 | length 16.6
  Top Layer w0.5: U5.8@125.349,67.945 126.238,67.945 127,68.707 R9.1
  Top Layer w1: 127.254,69.342 127.635,68.961 v1(129.032,68.961)
  Bottom Layer w1: v1(129.032,68.961) 138.684,68.961 P5.1
NetP6_5: P6.5 R18.1 | length 9.9
  Top Layer w0.254: P6.5 63.881,80.01 64.389,79.502 R18.1
NetP6_9: P6.9 R19.1 | length 8.2
  Top Layer w0.254: R19.1 65.032,83.312 66.421,84.701 P6.9
NetP7_2: P7.2 R21.1 | length 2.7
  Top Layer w0.254: R21.1 P7.2
NetP7_3: P7.3 R22.1 | length 2.7
  Top Layer w0.254: R22.1 114.427,85.471 P7.3
NetQ1_1: Q1.1 R3.1 | length 1.7
  Top Layer w0.5: Q1.1 114.544,67.165 R3.1
NetR5_1: R5.1 U2.2 | length 2.1
  Top Layer w0.254: U2.2 103.12,61.248 R5.1
NetR17_1: R17.1 S1.1 S1.3 | length 7.4
  Top Layer w0.254: R17.1 95.153,92.329 S1.1 S1.3
REG_ON_OFF: U1.5 U4.19 | length 36.8
  Top Layer w0.254: U4.19 84.943,91.793 86.086,90.649 89.437,90.649 92.329,87.757 v1(97.79,87.757) ; v1(97.79,81.915) 97.79,75.819 v1(98.298,75.311) ; U1.5 v1(102.108,72.009)
  Bottom Layer w0.254: v1(97.79,81.915) v1(97.79,87.757) ; v1(98.298,75.311) 101.6,72.009 v1(102.108,72.009)
REG_STAT: R2.2 U1.1 U4.5 | length 38.8
  Top Layer w0.2: U4.5 78.363,84.078 76.962,82.677 76.962,79.502 77.578,78.886 86.125,78.886 v1(86.868,79.629) ; v1(95.377,69.723) 95.377,69.977 95.623,69.731 R2.2 98.929,69.731 99.175,69.977 ; 99.187,69.977 100.965,69.977 101.219,69.723
  Top Layer w0.254: 101.219,69.723 U1.1
  Bottom Layer w0.254: v1(86.868,79.629) 93.091,73.406 93.091,72.009 v1(95.377,69.723)
REINIT_1: P8.1 S2.1 S2.3 | length 11.8
  Top Layer w0.254: S2.3 S2.1 140.069,82.943 P8.1
REINIT_2: C25.1 P7.1 R20.2 U4.37 | length 64.2
  Top Layer w0.2: U4.37 73.704,89.293 73.038,88.627 70.778,88.627 70.231,88.08 70.231,79.248 70.993,78.486 86.995,78.486 v1@88.392,79.883
  Top Layer w0.254: C25.1 R20.2 ; R20.2@107.069,80.264 P7.1
  Bottom Layer w0.2: v1(88.138,79.756) 102.616,79.756 104.775,81.915 106.68,81.915 v1(108.458,80.137)
SCL: R11.1 U2.4 U4.7 U7.6 | length 48.2
  Top Layer w0.254: v1@77.724,79.756 77.724,81.534 78.351,82.161 R11.1 79.363,82.657 U4.7 ; v1(78.486,76.2) 85.217,76.2 v1(89.662,71.755) ; U7.6 91.059,68.834 v1(91.821,69.596) 92.964,68.453 94.361,68.453 102.12,60.694 U2.4
  Bottom Layer w0.254: v1(77.724,80.01) 77.724,79.756 78.486,78.994 v1(78.486,76.2) ; v1(89.662,71.755) v1(91.821,69.596)
SDA: R10.1 U2.3 U4.8 U7.5 | length 46.5
  Top Layer w0.254: U4.8 79.863,82.435 R10.1 80.149,82.161 v1(82.169,80.141) ; v1(82.169,77.089) 86.614,77.089 v1(91.821,71.882) ; U7.5 89.281,67.564 v1@89.408,67.691 ; v1(93.98,69.723) 102.62,61.083 U2.3
  Bottom Layer w0.254: v1(82.169,77.089) v1(82.169,80.141) ; v1(89.662,67.818) 91.313,67.818 92.329,68.834 93.091,68.834 v1(93.98,69.723) v1(91.821,71.882)
TEMP1_ADC: C26.1 R23.1 RT1.1 U4.12 | length 38.3
  Top Layer w0.254: C26.1 67.924,62.984 RT1.1 68.199,63.944 ; R23.1 68.199,63.944 ; v1(78.994,74.549) 78.994,73.279 69.659,63.944 68.199,63.944 ; U4.12 82.141,88.293 v1(84.328,86.106)
  Bottom Layer w0.2: v1(78.994,74.549) 82.55,74.549 84.328,76.327 v1(84.328,86.106)
TEMP_ON: R23.2 U4.13 | length 34
  Top Layer w0.254: R23.2 68.199,68.072 v1(76.708,76.581) ; U4.13 82.631,88.793 84.048,87.376 v1@84.147,87.376
  Bottom Layer w0.2: v1(76.708,76.581) 76.708,80.645 78.105,82.042 81.381,82.042 83.885,84.546 83.885,85.126 83.058,85.953 83.058,86.614 83.82,87.376
  Bottom Layer w0.254: 83.82,87.376 v1(84.455,87.376)
V_CUR: U4.18 U5.5 | length 56.9
  Top Layer w0.254: U4.18 84.801,91.293 85.898,90.195 89.248,90.195 92.449,86.995 105.156,86.995 105.537,87.376 v1(107.442,87.376) ; v1@119.126,67.945 v1(119.169,67.902) U5.5
  Bottom Layer w0.254: v1(107.442,87.376) 110.744,84.074 110.744,75.057 117.899,67.902 v1(119.169,67.902)
VCC: C2.1 L1.2 L2.1 P6.2 R2.1 R10.2 R11.2 R20.1 U1.6 U7.8 | length 115.4
  Top Layer w0.254: P6.2 59.69,90.9 59.69,85.471 61.341,83.82 61.341,62.865 64.77,59.436 70.485,59.436 78.867,67.818 78.867,71.374 80.645,73.152 v1(80.645,75.311) 82.423,75.311 86.36,71.374 U7.8 ; R11.2 R10.2 v1(80.137,79.883) ; U7.8@88.048,71.374 88.691,70.731 R2.1 96.393,71.755 97.854,73.215 99.586,73.215 100.608,72.194 100.608,71.628 ; L1.2@99.906,70.823 100.711,71.628 ; 101.608,74.464 101.6,74.472 102.92,74.472 v1(105.791,77.343) ; v1(105.791,81.153) 106.942,81.153 R20.1
  Top Layer w0.3: 100.711,71.628 100.981,71.628 101.43,70.823
  Top Layer w0.5: L1.2@99.906,70.823 101.43,70.823 ; C2.1@100.499,72.085 101.608,73.194 101.608,74.464 ; 101.6,74.472 L2.1
  Bottom Layer w0.254: v1(80.137,79.883) 80.137,79.375 80.645,78.867 v1(80.645,75.311) ; v1(105.791,77.343) v1(105.791,81.153)
pads on no net: U2.1 U4.6 U4.38 U5.2 U5.3 U5.6 U5.7 U6.1 U6.2 U6.3 U6.14 U6.15 U6.16 U7.3 U7.7
copper on no net:
  other v3: 89.535,51.308 120.65,51.308 89.535,99.822

## Polygon pours and split planes (outlines as drawn)
GND on Bottom Layer "GND_POLYGON_BOTTOM" (solid, pour order 3): 73.914,99.187 57.912,99.187 57.912,48.387 147.912,48.387 147.912,75.387 119.888,75.387 119.912,75.411 119.912,99.187
GND on Top Layer "GND_POLYGON_BOTTOM" (solid, pour order 4): 73.914,99.187 57.912,99.187 57.912,48.387 147.912,48.387 147.912,75.387 119.888,75.387 119.912,75.411 119.912,99.187

## Keep-outs
Keep-Out Layer:
  lines w0.1: 119.888,88.265 119.888,78.994 122.428,78.994 122.428,88.289 119.912,88.289 ; 147.912,56.896 147.912,75.387 ; 57.912,48.387 147.912,48.387 ; 57.912,48.387 57.912,51.887 ; 57.912,48.387 147.912,48.387 ; 57.912,48.387 57.912,51.887 ; 57.912,51.887 ccw(c57.912,54.387) 57.912,56.887 ; 57.912,51.887 ccw(c57.912,54.387) 57.912,56.887 ; 57.912,56.887 57.912,107.387 ; 57.912,56.887 57.912,107.387 ; 57.912,107.387 119.912,107.387 ; 57.912,107.387 119.912,107.387 ; 119.888,75.387 119.888,77.978 ; 119.888,75.387 145.212,75.387 147.912,75.387 ; 119.888,75.387 119.888,77.978 ; 119.888,75.387 147.912,75.387 ; 119.888,77.978 145.212,77.978 ; 119.888,77.978 145.212,77.978 ; 119.912,89.287 119.912,107.387 ; 119.912,89.287 145.212,89.287 ; 119.912,89.287 119.912,107.387 ; 119.912,89.287 145.212,89.287 ; 145.212,77.978 145.212,89.287 ; 145.212,77.978 145.212,89.287 ; 147.912,48.387 147.912,51.887 ; 147.912,48.387 147.912,51.887 ; 147.912,51.887 cw(c147.912,54.387) 147.912,56.887 ; 147.912,51.887 cw(c147.912,54.387) 147.912,56.887 ; 147.912,56.887 147.912,75.387

## Other copper
Top Layer:
  rectangle net VCC: 100.449,70.823 101.219,72.424
  rectangle net GND: 73.914,99.187 77.147,99.822
  rectangle: 67.056,105.283 76.073,105.791
  pour cut-out: 115.57,101.092 115.697,100.584 115.951,100.076 116.332,99.822 116.84,99.568 117.221,99.568 117.983,99.822 118.364,100.203 118.618,100.965 118.618,101.219 118.491,101.727 118.237,102.108 117.729,102.489 117.094,102.616 116.586,102.489 116.078,102.235 115.697,101.727
  pour cut-out: 60.96,101.092 61.087,100.584 61.341,100.076 61.722,99.822 62.23,99.568 62.611,99.568 63.373,99.822 63.754,100.203 64.008,100.965 64.008,101.219 63.881,101.727 63.627,102.108 63.119,102.489 62.484,102.616 61.976,102.489 61.468,102.235 61.087,101.727
  pour cut-out: 60.96,57.531 61.087,57.023 61.341,56.515 61.722,56.261 62.23,56.007 62.611,56.007 63.373,56.261 63.754,56.642 64.008,57.404 64.008,57.658 63.881,58.166 63.627,58.547 63.119,58.928 62.484,59.055 61.976,58.928 61.468,58.674 61.087,58.166
  pour cut-out: 147.955,56.515 147.32,56.642 146.685,56.388 146.685,56.134 145.669,55.118 145.669,53.594 145.726,53.594 147.123,52.197 147.955,52.197
  pour cut-out: 57.785,56.515 58.42,56.642 59.055,56.388 59.055,56.134 60.071,55.118 60.071,53.594 60.014,53.594 58.617,52.197 57.785,52.197
  text "ASE V 1.5" at 125.73,52.578 h1.52
Bottom Layer:
  pour cut-out: 115.57,101.092 115.697,100.584 115.951,100.076 116.332,99.822 116.84,99.568 117.221,99.568 117.983,99.822 118.364,100.203 118.618,100.965 118.618,101.219 118.491,101.727 118.237,102.108 117.729,102.489 117.094,102.616 116.586,102.489 116.078,102.235 115.697,101.727
  pour cut-out: 60.96,101.092 61.087,100.584 61.341,100.076 61.722,99.822 62.23,99.568 62.611,99.568 63.373,99.822 63.754,100.203 64.008,100.965 64.008,101.219 63.881,101.727 63.627,102.108 63.119,102.489 62.484,102.616 61.976,102.489 61.468,102.235 61.087,101.727
  pour cut-out: 60.96,57.531 61.087,57.023 61.341,56.515 61.722,56.261 62.23,56.007 62.611,56.007 63.373,56.261 63.754,56.642 64.008,57.404 64.008,57.658 63.881,58.166 63.627,58.547 63.119,58.928 62.484,59.055 61.976,58.928 61.468,58.674 61.087,58.166
  pour cut-out: 147.955,56.515 147.32,56.642 146.685,56.388 146.685,56.134 145.669,55.118 145.669,53.594 145.726,53.594 147.123,52.197 147.955,52.197
  pour cut-out: 57.785,56.515 58.42,56.642 59.055,56.388 59.055,56.134 60.071,55.118 60.071,53.594 60.014,53.594 58.617,52.197 57.785,52.197

## Silkscreen, mask and mechanical layers (free items; w line width, h text height)
Bottom Overlay:
  text "Black" at 129.921,68.707 h1 r270
  text "Brown" at 132.334,68.707 h1 r270
  text "Yellow" at 134.747,68.707 h1 r270
  text "Orange" at 137.414,68.707 h1 r270
  text "Red" at 140.716,68.58 h1 r270
Mechanical 1:
  lines w0.1: 119.912,75.387 145.212,75.387 ; 119.912,75.411 119.912,89.287 ; 122.428,77.978 145.212,77.978
  lines w0.254: 57.912,104.847 60.452,104.847 60.452,107.387 ; 60.071,58.42 89.535,58.42 ; 60.452,54.356 89.535,54.356 ; 63.881,50.8 63.881,58.42 ; 63.881,64.516 63.881,56.515 71.882,56.515 79.883,56.515 ; 79.883,50.8 79.883,58.42 ; 79.883,54.864 79.883,56.515 ; 79.883,61.214 79.883,56.515 ; 89.535,99.822 89.535,51.308 ; 95.885,50.8 95.885,58.42 ; 95.885,54.864 95.885,56.515 ; 95.885,61.214 95.885,56.515 ; 111.887,50.8 111.887,58.42 ; 111.887,54.864 111.887,56.515 ; 111.887,61.214 111.887,56.515 ; 117.372,107.387 117.372,104.847 119.912,104.847 ; 119.888,56.515 111.887,56.515 ; 119.912,43.918 119.912,75.387 ; 120.65,51.308 120.65,54.356 89.535,54.356 ; 122.428,77.978 122.428,81.032 145.212,81.032 145.212,77.978 ; 122.428,89.281 122.428,86.227 145.206,86.227 ; 125.603,58.42 89.535,58.42 ; 126.492,81.026 126.492,86.227 ; 139.192,81.026 139.192,86.227 ; 145.212,86.233 145.212,89.287 ; 79.883,56.515 87.884,56.515 95.885,56.515 ; 89.535,51.308 89.535,58.42 ; 89.535,51.308 89.535,54.356 ; 95.885,56.515 103.886,56.515 111.887,56.515

## Text inside footprints (layer, text, board x,y; h text height)
P6: Top Overlay "10" at 66.675,94.361 h1.27 r90; Top Overlay "9" at 66.675,85.979 h1.27 r90; Top Overlay "1" at 61.722,86.487 h1.27 r90; Top Overlay "2" at 61.722,94.234 h1.27 r90